# EAGLE board LCmeter0-hd44780 (EAGLE 7.3.0)
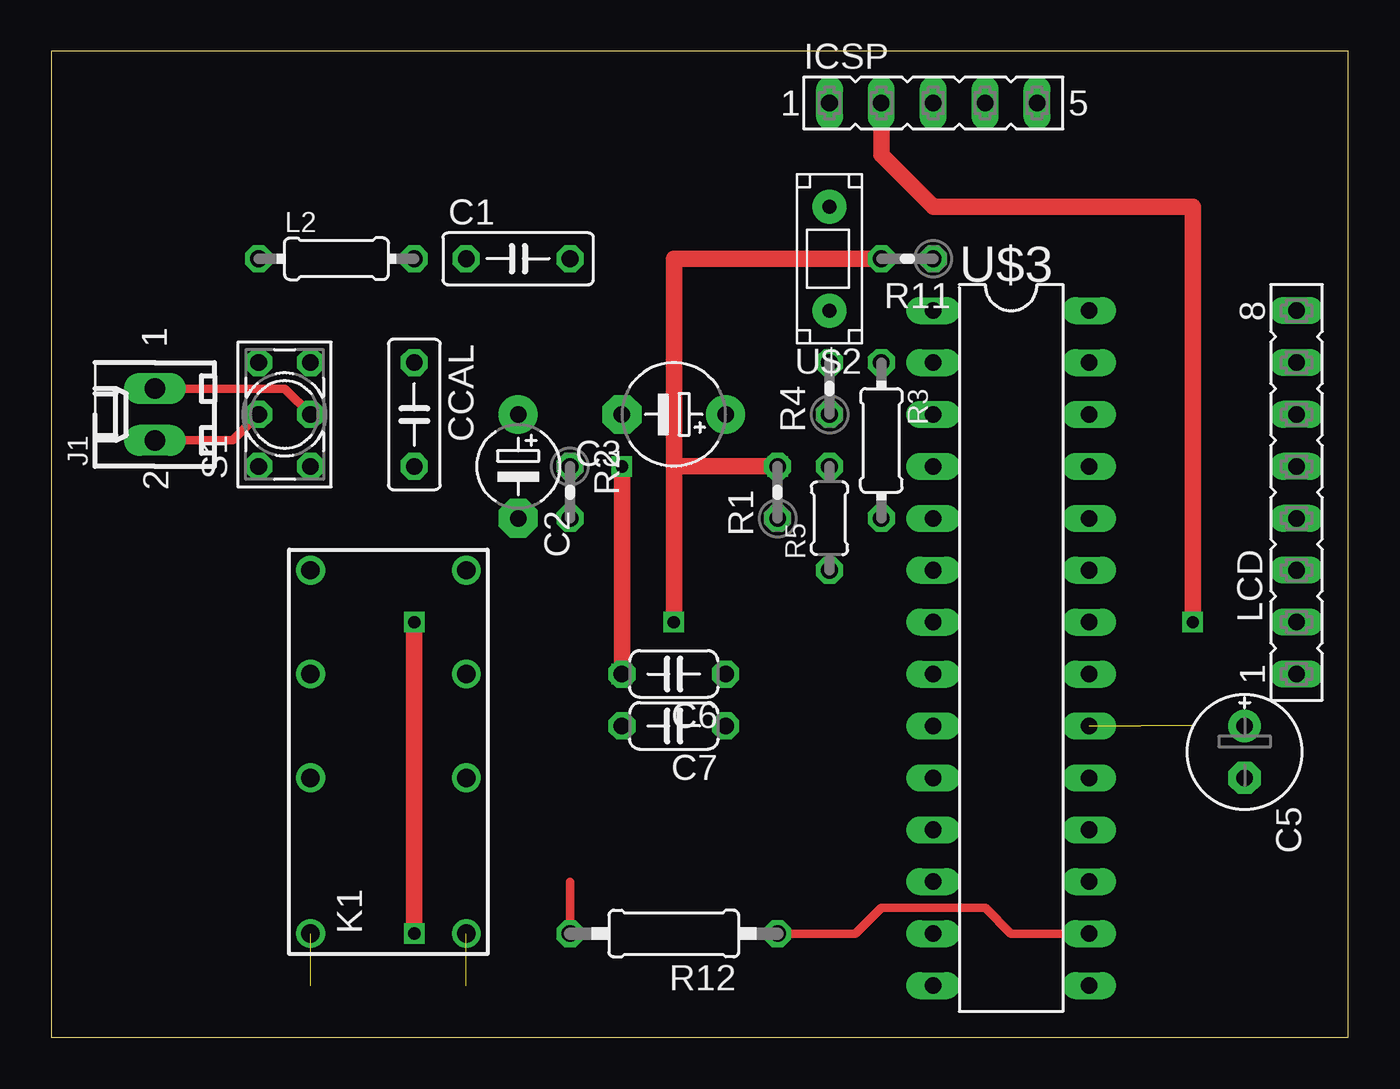
[diagram p0: board, top side]
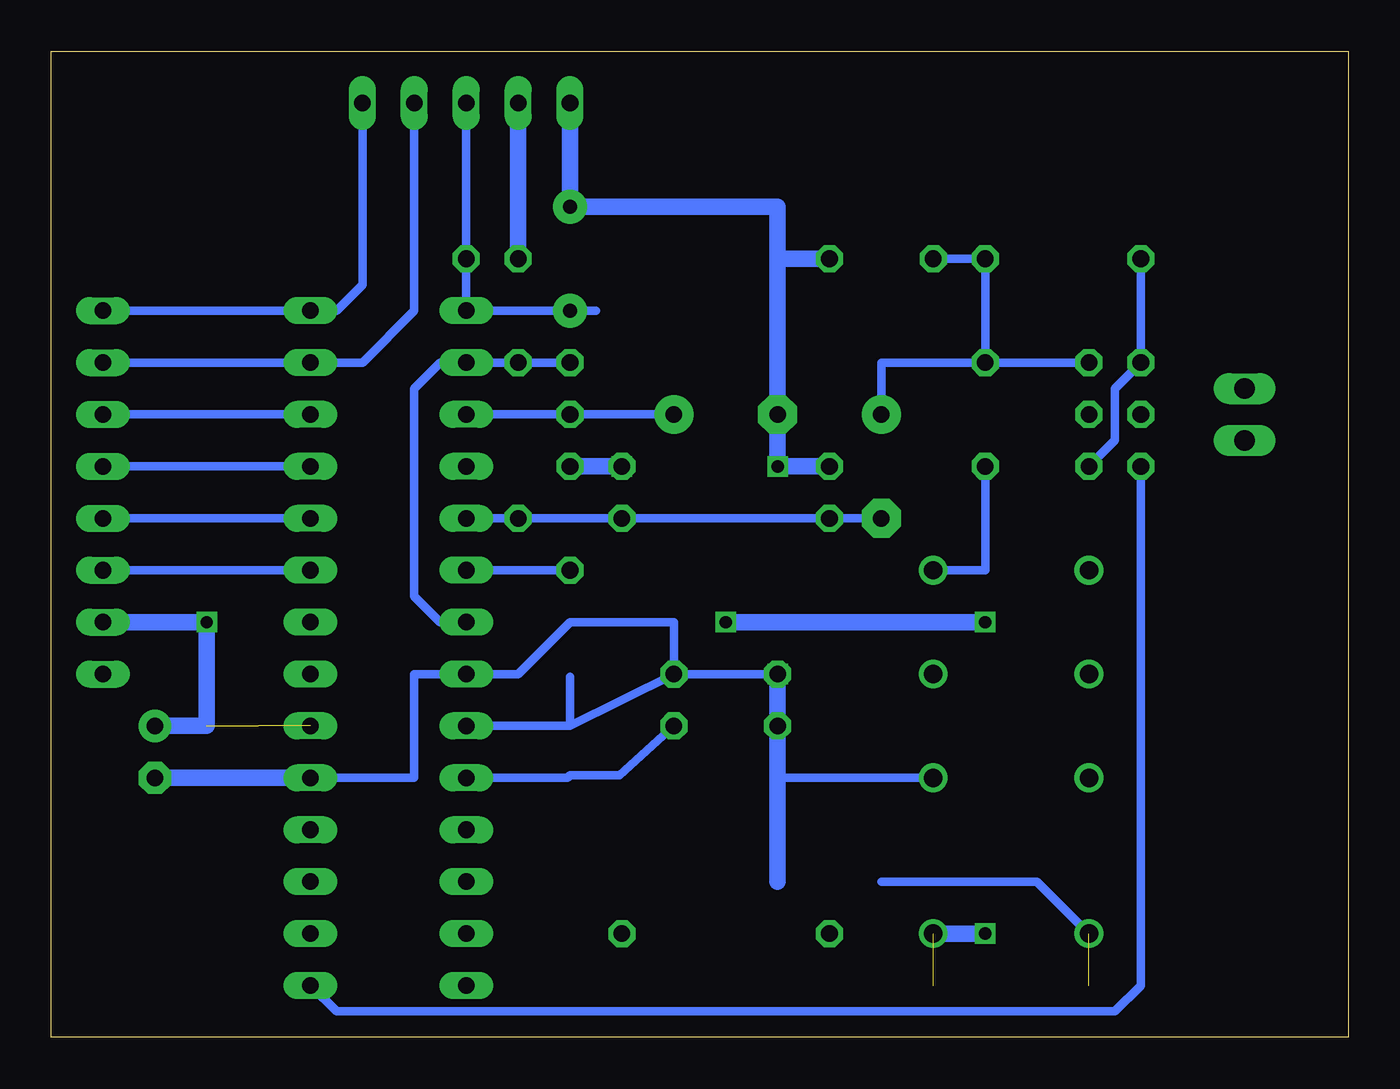
[diagram p1: board, bottom side, seen from below]

Size 63.5 x 48.26 mm. Coordinates in mm from the lower left corner, seen from the top.
Outline: 0,0 63.5,0 63.5,48.26 0,48.26 0,0
Copper layers (1*16): Top 0.035mm / dielectric 1.5mm / Bottom 0.035mm
Design rules "default": minimum track width 10mil, minimum drill 24mil, track to track 8mil, track to pad 8mil, pad to pad 8mil, via to via 8mil, smd to smd 8mil, copper to edge 40mil, drill to drill 8mil, minimum pad ring 10mil, minimum via ring 8mil, stop-mask expansion 4mil, vias tented up to drill 0mil, thermal gap 10mil

## Footprints (pad centres in the part's own frame; a part is rotated, then mirrored left to right if it is on the bottom)
C050-025X075 = drill 0.813 octagon: 1 -2.54,0; 2 2.54,0
E5-4 = drill 0.813 pad 1.905: + -2.54,0 | drill 0.813 pad 1.905 octagon: - 2.54,0
E5-5 = drill 0.813 pad 1.905: + -2.54,0 | drill 0.813 pad 1.905 octagon: - 2.54,0
E2,5-6E = drill 0.813 pad 1.575: + -1.27,0 | drill 0.813 pad 1.575 octagon: - 1.27,0
C050-024X044 = drill 0.813 octagon: 1 -2.54,0; 2 2.54,0
FE05-1 = drill 0.813 long: 1 -5.08,0; 2 -2.54,0; 3 0,0; 4 2.54,0; 5 5.08,0
6410-02 = drill 1.016 long: 1 1.27,0; 2 -1.27,0
DS2Y = drill 0.9: 1 -8.89,-3.81; 4 -1.27,-3.81; 6 3.81,-3.81; 8 8.89,-3.81; 9 8.89,3.81; 11 3.81,3.81; 13 -1.27,3.81; 16 -8.89,3.81
0204/7 = drill 0.813 octagon: 1 -3.81,0; 2 3.81,0
FE08 = drill 0.813 long: 1 -8.89,0; 2 -6.35,0; 3 -3.81,0; 4 -1.27,0; 5 1.27,0; 6 3.81,0; 7 6.35,0; 8 8.89,0
0204V = drill 0.813 octagon: 1 -1.27,0; 2 1.27,0
0204/5 = drill 0.813 octagon: 1 -2.54,0; 2 2.54,0
0207/10 = drill 0.813 octagon: 1 -5.08,0; 2 5.08,0
9450-2 = drill 0.813 octagon: 1 -2.54,-1.27; 2 0,-1.27; 3 2.54,-1.27; 4 -2.54,1.27; 5 0,1.27; 6 2.54,1.27
PB-5-1 = drill 0.7 pad 1.676: 2 1.27,1.27; 4 1.27,6.35
DIL28-3 = drill 0.813 long: 1 -16.51,-3.81; 2 -13.97,-3.81; 3 -11.43,-3.81; 4 -8.89,-3.81; 5 -6.35,-3.81; 6 -3.81,-3.81; 7 -1.27,-3.81; 8 1.27,-3.81; 9 3.81,-3.81; 10 6.35,-3.81; 11 8.89,-3.81; 12 11.43,-3.81; 13 13.97,-3.81; 14 16.51,-3.81; 15 16.51,3.81; 16 13.97,3.81; 17 11.43,3.81; 18 8.89,3.81; 19 6.35,3.81; 20 3.81,3.81; 21 1.27,3.81; 22 -1.27,3.81; 23 -3.81,3.81; 24 -6.35,3.81; 25 -8.89,3.81; 26 -11.43,3.81; 27 -13.97,3.81; 28 -16.51,3.81

## Placement (x,y rotation side)
C1  1nF  [C050-025X075]  22.86,38.1 0 top
C2  10uF  [E5-4]  22.86,27.94 270 top
C3  10uF  [E5-5]  30.48,30.48 180 top
C4  [C025-024X044]  53.34,13.97 270 top
C5  [E2,5-6E]  58.42,13.97 270 top
C6  22pF  [C050-024X044]  30.48,17.78 180 top
C7  22pF  [C050-024X044]  30.48,15.24 180 top
CCAL  1nF  [C050-025X075]  17.78,30.48 270 top
D1  1N4148  [DO35-7]  16.51,2.54 180 top
ICSP  [FE05-1]  43.18,45.72 0 top
J1  22-27-2021-02  [6410-02]  5.08,30.48 90 top
K1  DS2Y  [DS2Y]  16.51,13.97 90 top
L2  100uH  [0204/7]  13.97,38.1 0 top
LCD  [FE08]  60.96,26.67 90 top
Q1  [HC49/S]  38.1,15.24 270 top
R1  100k  [0204V]  35.56,26.67 90 top
R2  100k  [0204V]  25.4,26.67 270 top
R3  100k  [0204/7]  40.64,29.21 270 top
R4  47k  [0204V]  38.1,31.75 90 top
R5  4.7k  [0204/5]  38.1,25.4 90 top
R11  4.7k  [0204V]  41.91,38.1 180 top
R12  4.7k  [0207/10]  30.48,5.08 180 top
S1  9450-2  [9450-2]  11.43,30.48 90 top
T1  [TO92-CBE]  25.4,7.62 0 top
U$2  PB-5-2  [PB-5-1]  39.37,41.91 180 top
U$3  PIC16F876A-X/SP-COMP-B  [DIL28-3]  46.99,19.05 270 top

## Library data of the parts
C1-C3 C5-C7 CCAL L2 R1-R5 R11 R12 = rcl
C4 = r
D1 = d
ICSP LCD = con-lsta; OC_FARNELL: unknown; OC_NEWARK: unknown
J1 = con-molex; OC_FARNELL: unknown; OC_NEWARK: unknown
K1 = relay; MPN: DS2Y-S-DC5V; OC_FARNELL: unknown; OC_NEWARK: 13P3268
Q1 = q; OC_FARNELL: 1667008; OC_NEWARK: unknown
S1 = switch-misc
T1 = t
U$2 U$3 = mcu

## Nets
+5V: C4.1 C5.+ D1.C ICSP.2 K1.1 LCD.2 R1.2 R5.2 R11.2 U$3.20
GND: C1.2 C3.- C4.2 C5.- C6.2 C7.2 ICSP.1 K1.4 R2.1 T1.E U$2.2 U$3.8 U$3.19
L/C: S1.4 U$3.15
MCLR: ICSP.3 R11.1 U$2.4 U$3.1
N$1: LCD.3 U$3.23
N$2: LCD.4 U$3.24
N$3: LCD.5 U$3.25
N$4: LCD.6 U$3.26
N$5: J1.1 S1.2
N$6: R5.1 U$3.6
N$7: LCD.1
N$8: J1.2 S1.5
N$9: C7.1 Q1.2 U$3.10
N$10: C6.1 Q1.1 U$3.9
N$17: R3.1 R4.2 U$3.2 U$3.7
N$19: R12.2 T1.B
N$20: D1.A K1.16 T1.C
N$21: CCAL.2 K1.8
N$23: C1.1 C2.+ CCAL.1 L2.2 S1.3
N$24: L2.1 S1.1 S1.6
PGC: ICSP.4 LCD.7 U$3.27
PGD: ICSP.5 LCD.8 U$3.28
RA1: C3.+ R4.1 U$3.3
RA3: C2.- R1.1 R2.2 R3.2 U$3.5
RELAY: R12.1 U$3.16

## Tracks (layer width: path | path; a pad name or v marks a point on that pad's centre or on a via)
+5V  (via drill 0.6)  (3 unrouted)
  Top 0.813: v55.88,20.32 55.88,40.64 43.18,40.64 40.64,43.18 ICSP.2 | R11.2 30.48,38.1 30.48,27.94 | R1.2 30.48,27.94 | 30.48,27.94 v30.48,20.32 | v17.78,20.32 v17.78,5.08
  Bottom 0.813: LCD.2 v55.88,20.32 55.88,15.24 C5.+ | ICSP.2 R11.2 | R1.2 R5.2 | v30.48,20.32 v17.78,20.32 | v17.78,5.08 K1.1
  other vias: 35.56,27.94
GND  (via drill 0.6)
  Top 0.813: v27.94,27.94 C6.2
  Bottom 0.406: U$3.19 45.72,12.7 45.72,17.78 U$3.8 40.64,17.78 38.1,20.32 33.02,20.32 33.02,17.78 C6.2 | K1.4 27.94,12.7
  Bottom 0.813: ICSP.1 U$2.2 27.94,40.64 27.94,38.1 | C6.2 C7.2 27.94,12.7 27.94,7.62 | C1.2 27.94,38.1 | 27.94,38.1 C3.- v27.94,27.94 R2.1 | U$3.19 53.34,12.7 C5.-
  other vias: 27.94,17.78
L/C
  Bottom 0.406: U$3.15 49.53,1.27 11.43,1.27 10.16,2.54 S1.4
MCLR
  Bottom 0.406: ICSP.3 R11.1 U$3.1 U$2.4 36.83,35.56
N$1
  Bottom 0.406: U$3.23 LCD.3
N$2
  Bottom 0.406: LCD.4 U$3.24
N$3
  Bottom 0.406: U$3.25 LCD.5
N$4
  Bottom 0.406: LCD.6 U$3.26
N$5
  Top 0.406: S1.2 11.43,31.75 J1.1
N$6
  Bottom 0.406: R5.1 U$3.6
N$8
  Top 0.406: J1.2 8.89,29.21 S1.5
N$9
  Bottom 0.406: C7.1 35.69,12.83 38.1,12.83 38.23,12.7 U$3.10
N$10
  Bottom 0.406: U$3.9 38.1,15.24 | 38.1,17.65 38.1,15.24 | 38.1,15.24 C6.1
N$17
  Bottom 0.406: U$3.7 44.45,20.32 45.72,21.59 45.72,31.75 44.45,33.02 U$3.2 R3.1 R4.2
N$19
  Top 0.406: R12.2 25.4,7.62
N$20  (1 unrouted)
  Bottom 0.406: K1.16 15.24,7.62 22.86,7.62
N$21
  Bottom 0.406: CCAL.2 17.78,22.86 K1.8
N$23
  Bottom 0.406: CCAL.1 22.86,33.02 C2.+ | C1.1 L2.2 CCAL.1 | CCAL.1 S1.3
N$24
  Bottom 0.406: L2.1 S1.6 11.43,31.75 11.43,29.21 S1.1
PGC
  Bottom 0.406: LCD.7 U$3.27 48.26,33.02 45.72,35.56 ICSP.4
PGD
  Bottom 0.406: LCD.8 U$3.28 49.53,35.56 48.26,36.83 ICSP.5
RA1
  Bottom 0.406: C3.+ R4.1 U$3.3
RA3
  Bottom 0.406: U$3.5 R3.2 R1.1 R2.2 C2.-
RELAY
  Top 0.406: U$3.16 46.99,5.08 45.72,6.35 40.64,6.35 39.37,5.08 R12.1